# Altium PCB 红外接收电路.PcbDoc
Units mil, origin at the board's own origin, x right, y up, seen from the top; angles counter-clockwise.
Board outline 6000 x 4000 mil, 2 copper layers (Top Layer, Bottom Layer); 11 components, 9 nets, 33 pads, 1 vias.
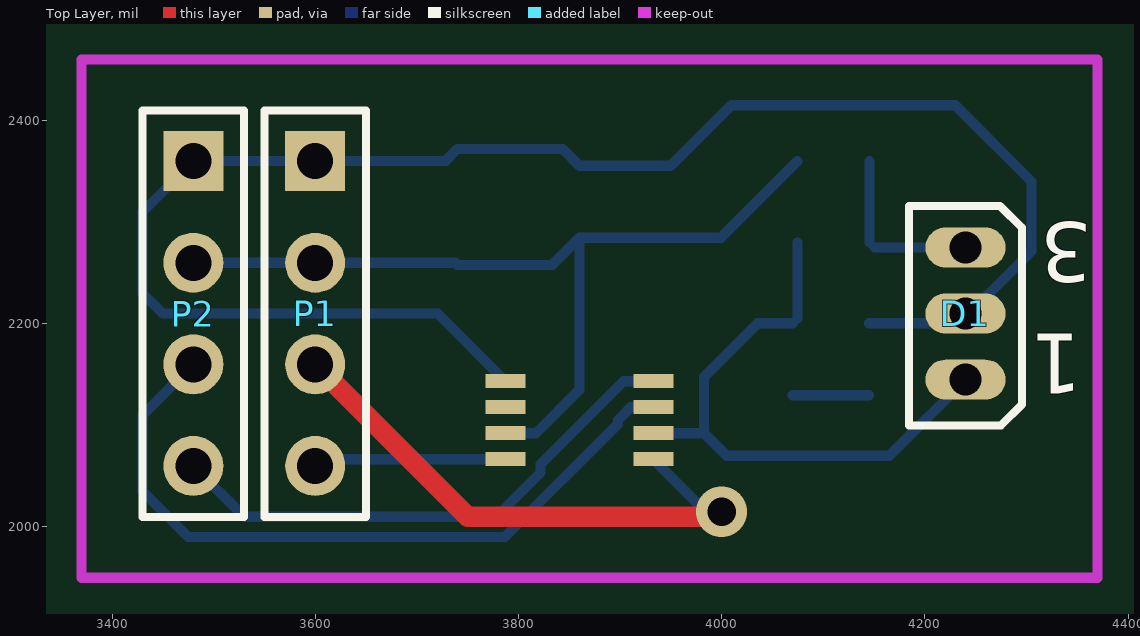
[diagram p0: Top Layer view]
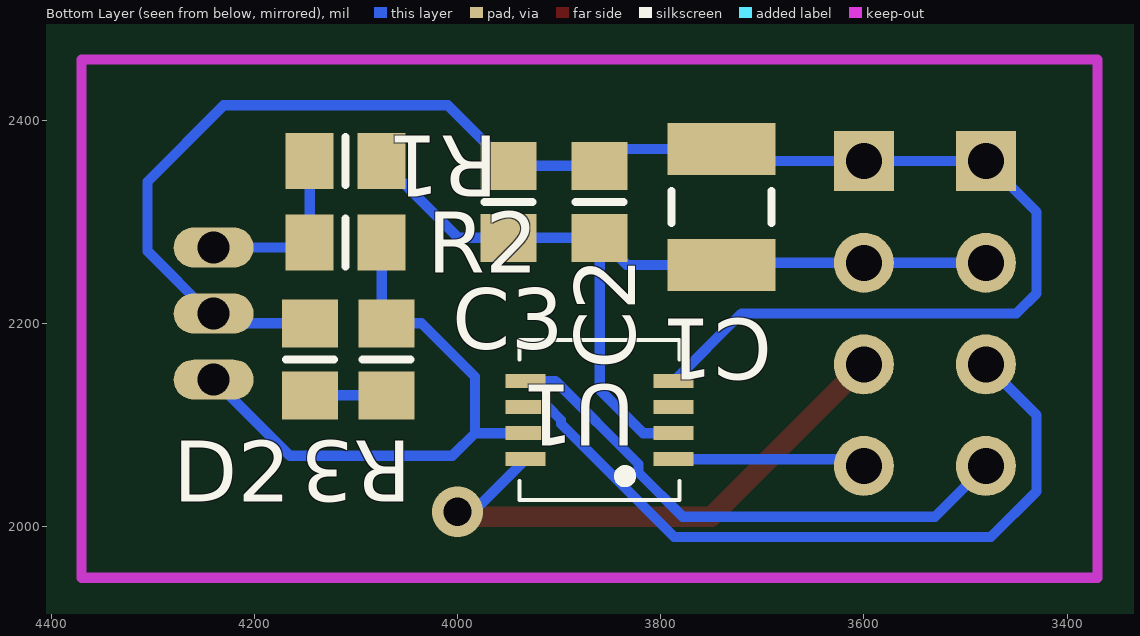
[diagram p1: Bottom Layer view, seen from below]

## Layer stack, top to bottom
Top Solder: solder mask 0.4, Solder Resist, Dk 3.5
Top Layer: signal copper 1.4
Dielectric 1: dielectric 12.6, FR-4, Dk 4.8
Bottom Layer: signal copper 1.4
Bottom Solder: solder mask 0.4, Solder Resist, Dk 3.5

## Board outline
1000,1000 7000,1000 7000,5000 1000,5000

## Design rules (kind name [scope] priority, off if disabled: settings)
Clearance [All] p1: gap=10
PolygonConnect [All] p1: connectstyle=Relief reliefconductorwidth=10 reliefentries=4 polygonreliefangle="90 Angle" airgapwidth=10
RoutingVias [All] p1: holewidth=28 width=50 viastyle="Through Hole" minholewidth=28 minwidth=50 maxholewidth=28 maxwidth=50
SolderMaskExpansion [All] p1: expansion=4
Width [All] p1: maxlimit=20 minlimit=10 preferedwidth=20 toplayer_minwidth=20 bottomlayer_maxwidth=10 bottomlayer_prefwidth=10 minimp=50.000000 maximp=50.000000 favimp=50.000000
29 further rules are at their usual default settings.

## Components (designator, comment, footprint, x,y, rotation, side; value= is the part's Value field where it differs from the comment)
C1 "Cap2" C1210_N 3740,2315 r90 bottom
C2 "Cap" 6-0805_N 3860,2320 r270 bottom
C3 "Cap" 6-0805_N 3950,2320 r90 bottom
D1 "HS0038B" E3 4240,2210 r180 top
D2 "LED1" 6-0805_N 4145,2165 r90 bottom
P1 "Header 4" HDR1X4 3600,2360 r270 top
P2 "Header 4" HDR1X4 3480,2360 r270 top
R1 "Res1" 6-0805_N 4110,2360 r0 bottom
R2 "Res1" 6-0805_N 4110,2280 r180 bottom
R3 "Res1" 6-0805_N 4070,2165 r90 bottom
U1 "STC15F104W_SOP8" DFN8 3860,2105 r0 bottom

## Footprints (in the part's own frame and the unit in brackets; to place one, negate y for a bottom-side part, rotate by r counter-clockwise, add the part's x,y. Pads: shape width x height; smd on the part's side, far side on the other; paste and mask are expansions set on the pad)
6-0805_N [mm] "Chip Resistor, Body 2.0x1.2mm, IPC Medium Density"
  rect 1.2x1.4 smd: 1(-0.9,0) 2(0.9,0)
  silkscreen extent 0,-0.6 0,0.6, body extent -1.07,-0.7 1.07,0.7, height 0.7
C1210_N [mm] "Chip Capacitor, Body 3.2x2.5mm, IPC Medium Density"
  rect 1.3x2.7 smd: 1(-1.45,0) 2(1.45,0)
  silkscreen extent -0.4,-1.25 0.4,1.25, body extent -1.7,-1.35 1.7,1.35, height 1.5
DFN8 [mm]
  rect 1x0.35 all layers, no hole: 1(-1.85,0.975) 2(-1.85,0.325) 3(-1.85,-0.325) 4(-1.85,-0.975) 5(1.85,-0.975) 6(1.85,-0.325) 7(1.85,0.325) 8(1.85,0.975)
  silkscreen extent -2,-2 2,2
E3 [mm] "TO, Flat Index; 3 In-Line, Axial Leads; Body Dia. 4.6mm; Lead Dia. 0.5 mm (max)"
  oval 2x1 hole 0.8: 1(0,1.651) 2(0,0) 3(0,-1.651)
  silkscreen extent -1.41,-2.69 1.41,2.79
HDR1X4 [mm] "Connector; Header; 4 Position"
  rect 1.5x1.5 hole 0.9: 1(0,0)
  round 1.5 hole 0.9: 2(2.54,0) 3(5.08,0) 4(7.62,0)
  silkscreen extent -1.27,-1.27 8.89,1.27

## Part data
C1 C2 C3: "Capacitor"
D2: "Typical RED GaAs LED"
P1 P2: "Header, 4-Pin"
R1 R2 R3: "Resistor"
U1: library part STC15F101W_SOP8_DIP8

## Via types
v1: diameter 50, hole 28, Top Layer to Bottom Layer, 1 vias

## Nets (pads, with @x,y where several pads share a name; then routed paths per layer and width w, separated by ;. In a path a pad name is that pad's centre, name@x,y a point inside that pad or via, vN(x,y) a via of type N, cw(c..) or ccw(c..) an arc to the next point about the centre after c; other vN are vias at no path point)
GND: C1.2 C2.1 C3.2 D1.2 D2.2 P1.1 P2.1 U1.4 | length 1694.5
  Bottom Layer w10: U1.4 3720.55,2210 3450,2210 3430,2230 3430,2310 P2.1 P1.1 3727.91,2360 C1.2 3843.35,2372.09 C2.1 C3.2 4009.57,2415 4230,2415 4305,2340 4305,2271.26 4243.74,2210 D1.2 4230.43,2200.43 D2.2
NetD1_1: D1.1 R2.2 R3.2 U1.7 | length 587
  Bottom Layer w10: U1.7 3982.8,2092.2 ; R3.2 4035.43,2200.43 3982.8,2147.8 3982.8,2092.2 ; R3.2@4074.57,2205 R2.2 ; D1.1 4165,2070 4005,2070 3982.8,2092.2
NetD1_3: D1.3 R1.2 R2.1 | length 169.6
  Bottom Layer w10: R2.1 R1.2 ; R2.1@4150.43,2275 D1.3
NetD2_1: D2.1 R3.1 | length 75
  Bottom Layer w10: R3.1 D2.1
OUT1: P1.4 U1.1 | length 180.6
  Bottom Layer w10: P1.4@3606.61,2066.61 U1.1
OUT2: P1.3 U1.8 | length 552.7
  Top Layer w20: P1.3 3750,2010 3995,2010 v1(4000,2015)
  Bottom Layer w10: U1.8 3984.45,2015 v1(4000,2015)
OUT3: P2.4 U1.5 | length 533.7
  Bottom Layer w10: P2.4 3530,2010 3778.34,2010 3821.85,2053.51 3821.85,2061.85 3903.39,2143.39 U1.5
OUT4: P2.3 U1.6 | length 722.3
  Bottom Layer w10: P2.3 3430,2110 3430,2035 3475,1990 3786.62,1990 3898.15,2101.53 3898.15,2105.31 3910.64,2117.8 U1.6
VCC: C1.1 C2.2 C3.1 P1.2 P2.2 R1.1 U1.2 | length 874.9
  Bottom Layer w10: P2.2 P1.2 C1.1@3737.91,2260 ; C1.1 3833.35,2257.91 C2.2 ; U1.2 3817.2,2092.2 3860,2135 C2.2 ; R1.1 3999.13,2284.57 C3.1 C2.2
pads on no net: U1.3

## Keep-outs
Keep-Out Layer:
  lines w10: 3370,1950 4370,1950 4370,2460 3370,2460 3370,1950

## Text inside footprints (layer, text, board x,y; h text height)
D1: Top Overlay "3" at 4365,2300 h59.05 r180; Top Overlay "1" at 4355,2190 h59.05 r180